# Altium PCB NewPrintMainV3.PcbDoc
Units mil, origin at the board's own origin, x right, y up, seen from the top; angles counter-clockwise.
Board outline 3935 x 3600 mil, 2 copper layers (Top Layer, Bottom Layer); 64 components, 81 nets, 214 pads, 14 vias.
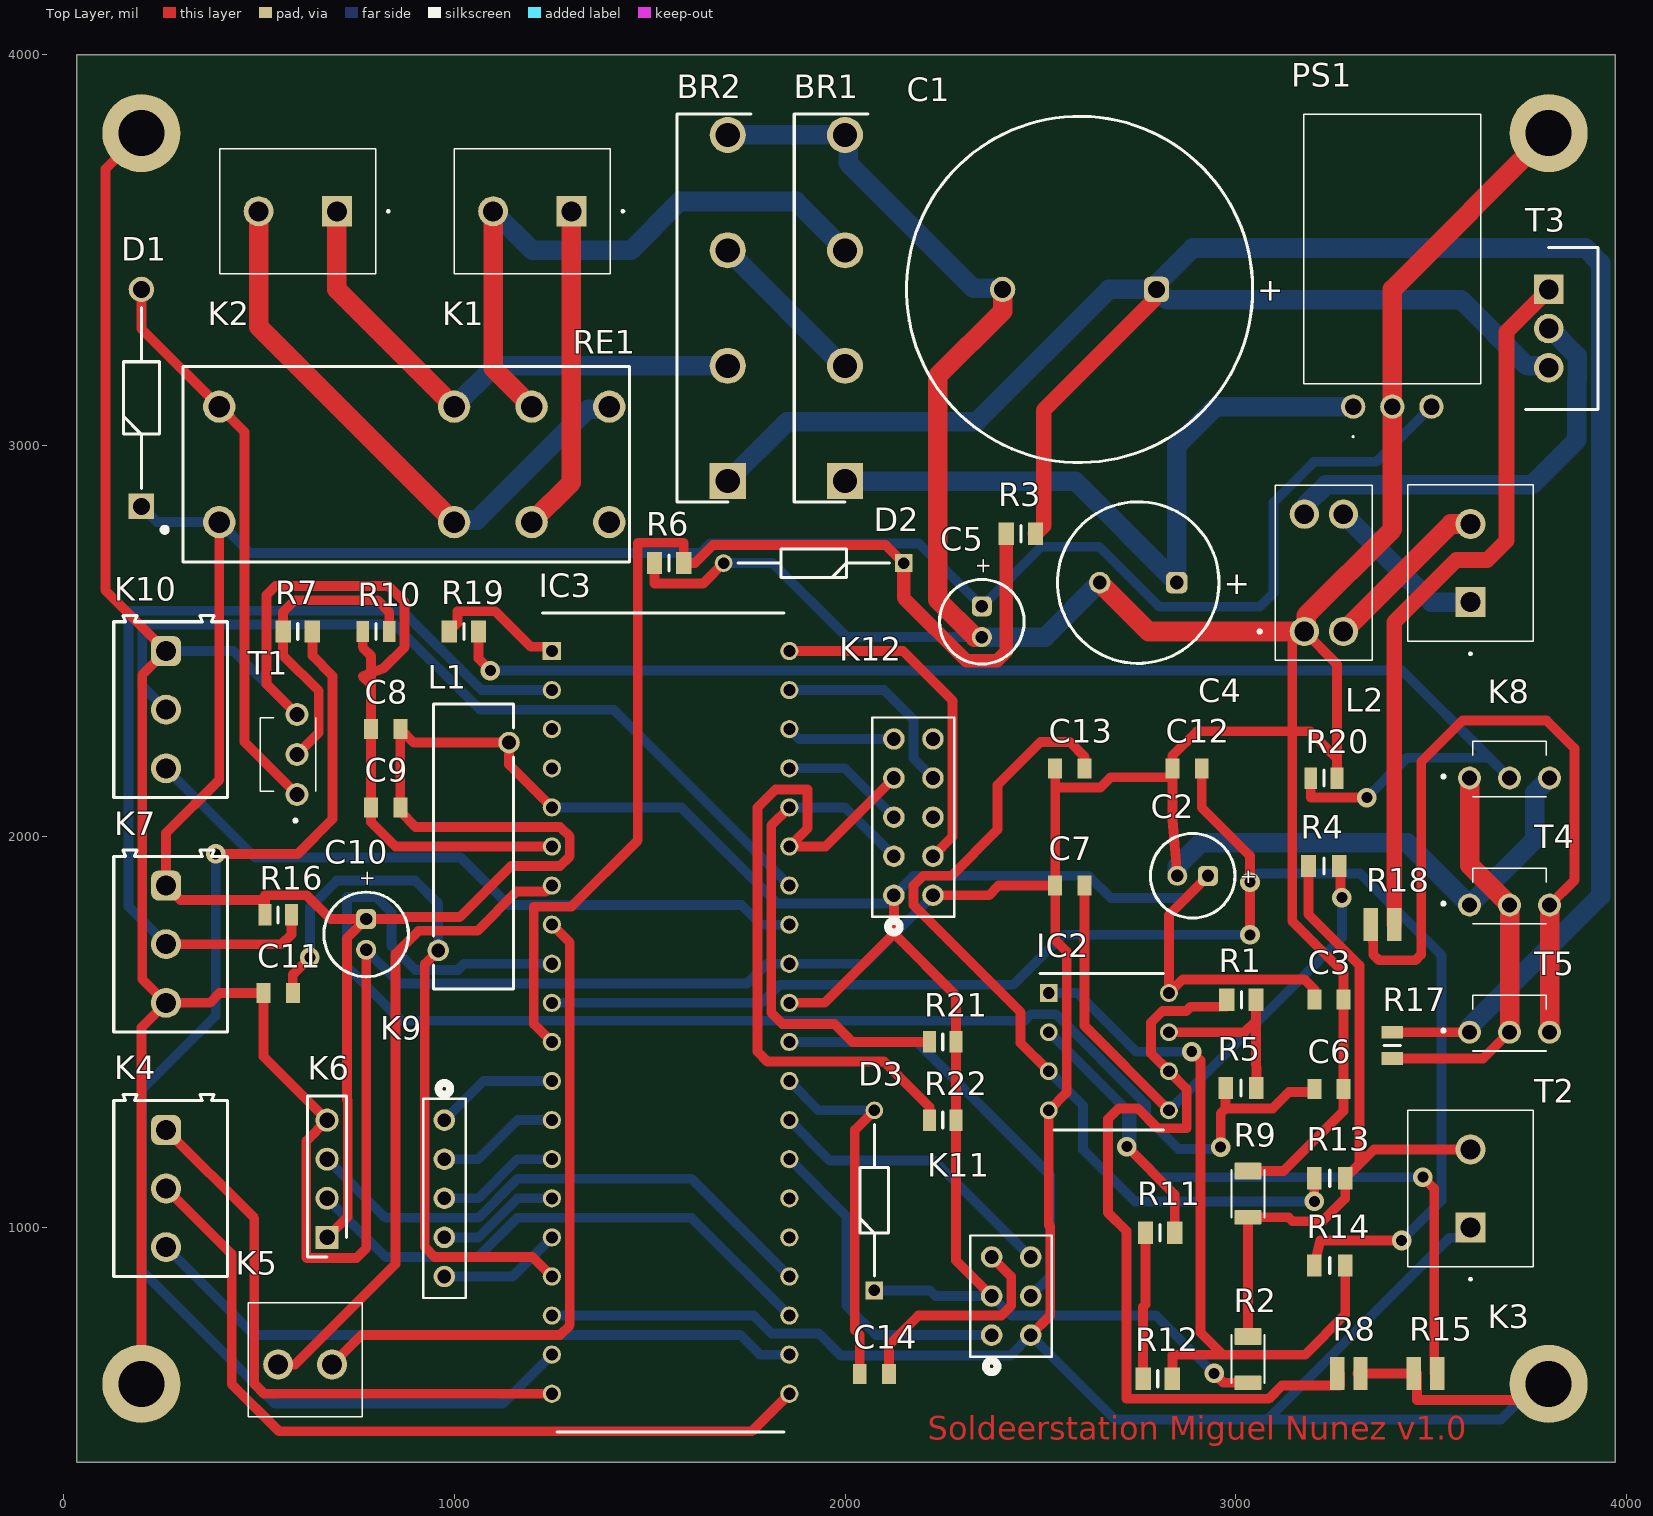
[diagram p0: Top Layer view]
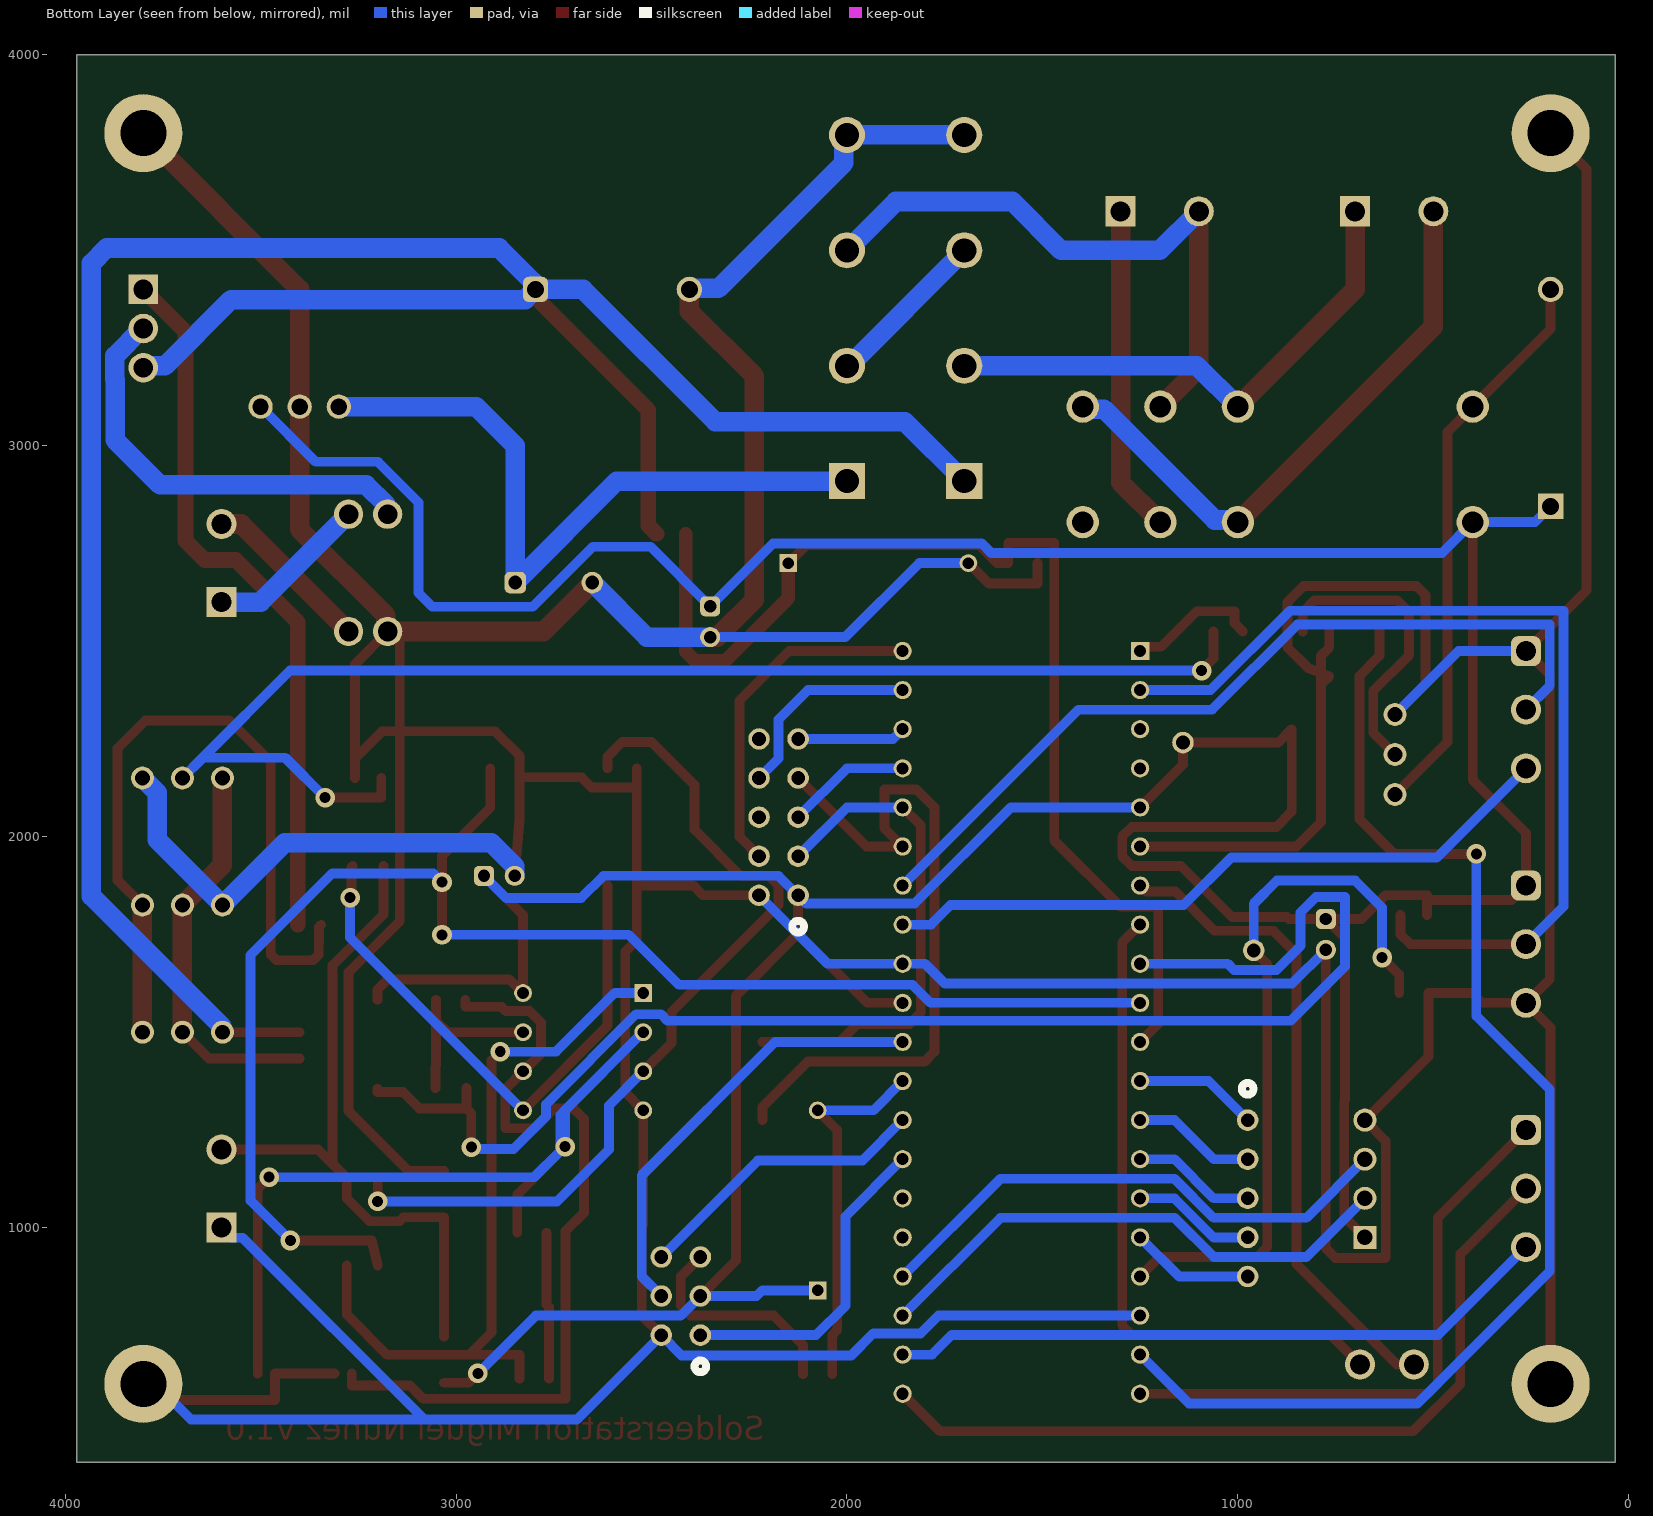
[diagram p1: Bottom Layer view, seen from below]

## Layer stack, top to bottom
Top Solder: solder mask 0.4, Solder Resist, Dk 3.5
Top Layer: signal copper 1.4
Dielectric 1: dielectric 12.6, FR-4, Dk 4.8
Bottom Layer: signal copper 1.4
Bottom Solder: solder mask 0.4, Solder Resist, Dk 3.5

## Board outline
35,400 3970,400 3970,4000 35,4000

## Design rules (kind name [scope] priority, off if disabled: settings)
Clearance [All] p1: gap=10 ignorepadtopadclearanceinfootprint=FALSE except(0: Arc-Text Arc-Hole Track-Text Track-Hole SMDPad-Text SMDPad-Hole THPad-Hole Via-Hole Fill-Hole Poly-Hole Region-Hole Text-Hole)
Height [All] p1: minheight=0 maxheight=1700 prefheight=500
HoleSize [All] p1: absolutevalues=TRUE maxlimit=120 minlimit=1 maxpercent=80.000 minpercent=20.000
PolygonConnect [All] p1: connectstyle=Relief reliefconductorwidth=10 reliefentries=4 polygonreliefangle="90 Angle" airgapwidth=10
RoutingCorners [All] p1: cornerstyle=45-Degree minsetback=150 maxsetback=150
RoutingVias [All] p1: holewidth=28 width=50 viastyle="Through Hole" minholewidth=28 minwidth=50 maxholewidth=50 maxwidth=100
SolderMaskExpansion [All] p1: expansion=4 istentingtop=FALSE
UnRoutedNet [All] p1: checkbadconnections=TRUE
Width [All] p1: maxlimit=50 minlimit=20 preferedwidth=25 minimp=50.000000 maximp=50.000000 favimp=50.000000
26 further rules are at their usual default settings.

## Classes and differential pairs
component class Voeding: BR1 BR2 C1 C4 C5 D1 D2 K1 K2 PS1 R3 R6 RE1
component class Versterker: C2 C3 C6 C7 C12 C13 IC2 K3 R1 R2 R4 R5 R8 R9 R11 R12 R13 R14 R15
component class Regelaar: K8 L2 R17 R18 R20 T2 T3 T4 T5
component class MainIC: C8 C9 C10 C11 C14 D3 IC3 K4 K5 K6 K7 K9 K10 K11 K12 L1 R7 R10 R16 R19 R21 R22 T1

## Components (designator, comment, footprint, x,y, rotation, side; value= is the part's Value field where it differs from the comment)
BR1 "KBJ608G" TO750P480X2500X1900-4P 2000,2909.45 r90 top
BR2 "KBJ608G" TO750P480X2500X1900-4P 1700,2909.45 r90 top
C1 "4700µF" WCAP-ATG8_D22H41 2600,3400 r0 top
C2 "10µF" WCAP-AT1H_D5H11 2889.37,1900 r0 top
C3 "100nF" WCAP-CSGP_0805_L2W1.25H0.8_Reflow 3238.09,1583 r0 top
C4 "100µF" WCAP-AT1H_D10H16 2750,2650 r0 top
C5 "10µF" WCAP-AT1H_D5H11 2350,2550 r90 top
C6 "10nF" WCAP-CSGP_0805_L2W1.25H0.8_Reflow 3238.09,1355 r0 top
C7 "10nF" WCAP-CSGP_0805_L2W1.25H0.8_Reflow 2575,1875 r0 top
C8 "100nF" WCAP-CSGP_0805_L2W1.25H0.8_Reflow 825,2275 r0 top
C9 "100nF" WCAP-CSGP_0805_L2W1.25H0.8_Reflow 825,2075 r0 top
C10 "10µF" WCAP-AT1H_D5H11 775,1750 r90 top
C11 "100nF" WCAP-CSGP_0805_L2W1.25H0.8_Reflow 550,1600 r0 top
C12 "10nF" WCAP-CSGP_0805_L2W1.25H0.8_Reflow 2875,2175 r0 top
C13 "10nF" WCAP-CSGP_0805_L2W1.25H0.8_Reflow 2575,2175 r0 top
C14 "100nF" WCAP-CSGP_0805_L2W1.25H0.8_Reflow 2075,625 r180 top
D1 "1N4007-B" DIOAD1410W90L470D235 200,2844.88 r90 top
D2 "1N5231B" DIOAD1165W56L425D185 2150,2700 r180 top
D3 "1N4148" DIOAD1165W56L425D185 2075,839.37 r90 top
IC2 "MCP6002-I_P" DIP781W56P254L950H533Q8N 2675,1450 r0 top
IC3 "ATMEGA4809-PF" DIP1543W58P254L5175H635Q40N 1553.74,1525 r0 top
K1 "2 pin" 1729128 1300,3600 r180 top
K2 "2 pin" 1729128 700,3600 r180 top
K3 "2 pin" 1729128 3600,1000 r90 top
K4 "3 pin" 691214310003 275,1100 r270 top
K5 "2 pin" 691214110002 550,650 r0 top
K6 "4 pin" SHDR4W78P0X254_1X4_1026X252X700P 675,975 r90 top
K7 "3 pin" 691214310003 275,1725 r270 top
K8 "2 pin" 1729128 3600,2600 r90 top
K9 "5 pin" 215297-5_TYC 975,1275 r270 top
K10 "3 pin" 691214310003 275,2325 r270 top
K11 "6pin" 215307-3_TYC 2375,725 r90 top
K12 "10 pin" 215307-5_TYC 2125,1850 r90 top
L1 "10uH, 2.5A" 744711003 1050,1975 r90 top
L2 "10A" CM2545X171B10 3175,2525 r0 top
PS1 "R-78B5.0-1.0L" R78B1210L 3300,3100 r0 top
R1 "18k" RESC2012X60N 3013.98,1583 r180 top
R2 "1M" RESC3115X65N 3030.64,663.81 r270 top value=1M0Ω
R3 "65k" RESC2012X60N 2450,2775 r0 top
R4 "5k6" RESC2012X50N 3225,1925 r180 top
R5 "5k6" RESC2012X50N 3013,1357 r0 top
R6 "10k" RESC2012X60N 1550,2700 r0 top
R7 "10k" RESC2012X60N 600,2525 r0 top
R8 "100" RESC1220X65N 3289,627 r180 top
R9 "10M" RESC3115X65N 3030.64,1087 r270 top value=1M0Ω
R10 "4k7" CAPC2012X65N 800,2525 r180 top
R11 "18k" RESC2012X60N 2806,987 r0 top
R12 "18k" RESC2012X60N 2800,613.22 r180 top
R13 "5k6" RESC2012X50N 3240,1126 r0 top
R14 "5k6" RESC2012X50N 3240,903 r0 top
R15 "100" RESC1220X65N 3485,627 r0 top
R16 "4k7" CAPC2012X65N 550,1800 r180 top
R17 "4k7" CAPC2012X65N 3400,1466.14 r90 top
R18 "100" RESC1220X65N 3375,1775 r0 top
R19 "10k" RESC2012X60N 1025,2525 r0 top
R20 "4k7" CAPC2012X65N 3225,2150 r180 top
R21 "4k7" CAPC2012X65N 2250,1475 r0 top
R22 "4k7" CAPC2012X65N 2250,1275 r180 top
RE1 "RT424005" RT42 399.21,2952.36 r0 top
T1 "NPN BC547CTFR" BC33740TA 575,2175 r90 top
T2 "NPN BC547CTFR" BC33740TA 3664.57,1523.03 r0 top
T3 "IRF9Z34NPBF" TO254P469X1042X1967-3P 3800,3400 r270 top
T4 "NPN BC547CTFR" BC33740TA 3664.57,2173.03 r0 top
T5 "BC557ATA" BC33740TA 3664.57,1848.03 r0 top

## Footprints (in the part's own frame and the unit in brackets; to place one, negate y for a bottom-side part, rotate by r counter-clockwise, add the part's x,y. Pads: shape width x height; smd on the part's side, far side on the other; paste and mask are expansions set on the pad)
215297-5_TYC [mil]
  round 55 hole 35 mask+0: 1(0,0) 2(100,0) 3(200,0) 4(300,0) 5(400,0)
  silkscreen extent -95,-54 455,55, body extent 0,0 10,10, height 10
215307-3_TYC [mil]
  round 55 hole 35 mask+0: 1(0,0) 2(100,0) 3(200,0) 4(200,-100) 5(100,-100) 6(0,-100)
  silkscreen extent -95,-154 255,55, body extent 0,0 10,10, height 10
215307-5_TYC [mil]
  round 55 hole 35 mask+0: 1(0,0) 2(100,0) 3(200,0) 4(300,0) 5(400,0) 6(400,-100) 7(300,-100) 8(200,-100) 9(100,-100) 10(0,-100)
  silkscreen extent -95,-154 455,55, body extent 0,0 10,10, height 10
1729128 [mm]
  rect 1.95x1.95 hole 1.3: 1(0,0)
  round 1.95 hole 1.3: 2(5.08,0)
  silkscreen extent -3.4,-4.08 7.62,4.08, body extent -3.07,-9.9 7.49,3.6, height 4.05
744711003 [mm] "Rod Core Choke, THT, 2-leads"
  round 1.4 hole 0.9: 1(-6.75,2.3) 2(6.75,-2.3)
  silkscreen extent -9.25,-2.6 9.25,2.6, body extent -9,-2.55 9,2.55, height 5.2
691214110002 [mm]
  round 1.95 hole 1.3: 1(0,0) 2(3.5,0)
  silkscreen extent -1.95,-3.4 5.45,4, body extent -1.95,-3.4 5.45,4, height 8.8
691214310003 [mm] "3,81mm - Horizontal wire entry - Rising cage clamp - 03p"
  rrect50% 1.95x1.95 hole 1.3: 1(-3.81,-0.3)
  round 1.95 hole 1.3: 2(0,-0.3) 3(3.81,-0.3)
  silkscreen extent -6.11,-3.7 5.71,3.7, body extent -6.12,-3.7 5.71,3.7, height 8.55
BC33740TA [mm]
  round 1.493 hole 0.96: 1(-1.7,-0.585) 2(0.9,-0.585) 3(3.5,-0.585)
  silkscreen extent -3.5,-1.81 3.28,1.81, body extent -2.2,-2.42 3.96,1.71, height 8.67
CAPC2012X65N [mm]
  rect 0.83x1.39 smd: 1(-0.86,0) 2(0.86,0)
  silkscreen extent 0,-0.53 0,0.53, body extent -1,-0.63 1,0.63, height 0.65
CM2545X171B10 [mil]
  round 75 hole 50: 1(0,0) 2(100,0) 3(100,300) 4(0,300)
  silkscreen extent -118,-74 174,374, body extent -74,-74 174,374, height 378
DIOAD1165W56L425D185 [mm]
  rect 1.15x1.15 hole 0.75: 1(0,0)
  round 1.15 hole 0.75: 2(11.7,0)
  silkscreen extent 0.93,-0.93 10.77,0.93, body extent -0.28,-0.92 11.93,0.92, height 1.84
DIOAD1410W90L470D235 [mm]
  rect 1.65x1.65 hole 1.1: 1(0,0)
  round 1.65 hole 1.1: 2(14.1,0)
  silkscreen extent 1.18,-1.18 12.92,1.18, body extent -0.45,-1.35 14.55,1.35, height 2.69
DIP781W56P254L950H533Q8N [mm]
  rect 1.159x1.159 hole 0.759: 1(-3.905,3.81)
  round 1.159 hole 0.759: 2(-3.905,1.27) 3(-3.905,-1.27) 4(-3.905,-3.81) 5(3.905,-3.81) 6(3.905,-1.27) 7(3.905,1.27) 8(3.905,3.81)
  silkscreen extent -4.48,-5.08 3.56,5.08, body extent -4.05,-4.75 4.05,4.75, height 5.33
DIP1543W58P254L5175H635Q40N [mm]
  rect 1.184x1.184 hole 0.784: 1(-7.715,24.13)
  round 1.184 hole 0.784: 2(-7.715,21.59) 3(-7.715,19.05) 4(-7.715,16.51) 5(-7.715,13.97) 6(-7.715,11.43) 7(-7.715,8.89) 8(-7.715,6.35) 9(-7.715,3.81) 10(-7.715,1.27) 11(-7.715,-1.27) 12(-7.715,-3.81) 13(-7.715,-6.35) 14(-7.715,-8.89) 15(-7.715,-11.43) 16(-7.715,-13.97) 17(-7.715,-16.51) 18(-7.715,-19.05) 19(-7.715,-21.59) 20(-7.715,-24.13) 21(7.715,-24.13) 22(7.715,-21.59) 23(7.715,-19.05) 24(7.715,-16.51) 25(7.715,-13.97) 26(7.715,-11.43) 27(7.715,-8.89) 28(7.715,-6.35) 29(7.715,-3.81) 30(7.715,-1.27) 31(7.715,1.27) 32(7.715,3.81) 33(7.715,6.35) 34(7.715,8.89) 35(7.715,11.43) 36(7.715,13.97) 37(7.715,16.51) 38(7.715,19.05) 39(7.715,21.59) 40(7.715,24.13)
  silkscreen extent -8.31,-26.61 7.37,26.61, body extent -7.86,-25.88 7.86,25.88, height 6.35
R78B1210L [mm]
  round 1.575 hole 1.05: 1(0,0) 2(2.54,0) 3(5.08,0)
  silkscreen extent -3.21,-2 8.29,19, body extent -3.26,-0.17 8.34,18.83, height 8.51
RESC1220X65N [mm]
  rect 0.925x2.15 smd: 1(-0.762,0) 2(0.762,0)
  body extent -0.6,-1 0.6,1, height 0.65
RESC2012X50N [mm]
  rect 0.95x1.45 smd: 1(-1,0) 2(1,0)
  silkscreen extent 0,-0.53 0,0.53, body extent -1.02,-0.63 1.02,0.63, height 0.5
RESC2012X60N [mm]
  rect 1x1.45 smd: 1(-0.95,0) 2(0.95,0)
  silkscreen extent 0,-0.53 0,0.53, body extent -1,-0.63 1,0.63, height 0.5
RESC3115X65N [mm]
  rrect14% 1.09x1.77 smd: 1(-1.465,0)
  rrect14% 0.94x1.77 smd: 2(1.54,0)
  silkscreen extent -1.55,-1.07 1.55,1.07
RT42 [mm]
  round 2.1 hole 1.4: 1(0,-3.75) 2(15.26,-3.75) 3(20.3,-3.75) 4(25.34,-3.75) 5(25.34,3.75) 6(20.3,3.75) 7(15.26,3.75) 8(0,3.75)
  silkscreen extent -3.67,-6.35 26.65,6.35, body extent -2.21,-6.35 26.79,6.35, height 15.86
SHDR4W78P0X254_1X4_1026X252X700P [mm]
  rect 1.5x1.5 hole 1: 1(0,0)
  round 1.5 hole 1: 2(2.54,0) 3(5.08,0) 4(7.62,0)
  silkscreen extent -1.27,-1.26 9.19,1.26, body extent -1.21,-1.26 8.95,1.26, height 6.9
TO254P469X1042X1967-3P [mm]
  rect 1.92x1.92 hole 1.28: 1(0,0)
  round 1.92 hole 1.28: 2(2.54,0) 3(5.08,0)
  silkscreen extent -2.73,-1.49 7.81,3.2, body extent -2.67,-1.5 7.75,3.19, height 18.84
TO750P480X2500X1900-4P [mm]
  rect 2.34x2.34 hole 1.56: 1(0,0)
  round 2.34 hole 1.56: 2(7.5,0) 3(15,0) 4(22.5,0)
  silkscreen extent -1.35,-1.5 23.85,3.3, body extent -1.25,-1.5 23.75,3.3, height 18.5
WCAP-AT1H_D5H11 [mm] "Aluminium Electrolytic Radial THD Capacitors, 5x11mm"
  rrect50% 1.3x1.3 hole 0.8: 1(1,0)
  round 1.3 hole 0.8: 2(-1,0)
  silkscreen extent -2.75,-2.75 2.75,2.75, body extent -2.49,-2.5 2.5,2.5, height 11.26
WCAP-AT1H_D10H16 [mm] "Aluminium Electrolytic Radial THD Capacitors, 10x16mm"
  rrect50% 1.4x1.4 hole 0.9: 1(2.5,0)
  round 1.4 hole 0.9: 2(-2.5,0)
  silkscreen extent -5.25,-5.25 5.25,5.25, body extent -4.99,-5 5,5, height 16.26
WCAP-ATG8_D22H41 [mm] "Aluminum Electrolytic Capacitors, 22x41mm"
  rrect50% 1.65x1.65 hole 1.1: 1(5,0)
  round 1.65 hole 1.1: 2(-5,0)
  silkscreen extent -11.25,-11.25 11.25,11.25, body extent -10.99,-11 11,11, height 41.31
WCAP-CSGP_0805_L2W1.25H0.8_Reflow [mm] "Ceramic Capacitors, body 2x1.25mm"
  rect 0.9x1.3 smd: 1(-0.95,0) 2(0.95,0)
  body extent -1,-0.62 1,0.63, height 0.8

## Part data
BR1 BR2: "Bridge Rectifier", Manufacturer_Name="Diodes Inc.", Mouser2 Part Number=621-KBJ608G, Datasheet Link=https://componentsearchengine.com//KBJ608G.pdf, Height=4.8mm, Manufacturer_Part_Number=KBJ608G, Mouser2 Price/Stock=https://www.mouser.com/Search/Refine.aspx?Keyword=621-KBJ608G
C1: library part "ELCAP 4700µF", "Capacitor Polarised ESK478M050AQ3AA", Manufacturer_Name=Kemet, Manufacturer_Part_Number=ESK478M050AQ3AA, Mouser2 Part Number=80-ESK478M050AQ3AA, Datasheet Link=https://componentsearchengine.com//ESK478M050AQ3AA.pdf, Height=37mm, Mouser2 Price/Stock=https://www.mouser.com/Search/Refine.aspx?Keyword=80-ESK478M050AQ3AA
C2 C5 C10: library part "ELCAP 10µF", "Capacitor Polarised Wurth Elektronik 860240672002 10µF", Manufacturer_Name="Wurth Elektronik", Manufacturer_Part_Number=860240672002, Datasheet Link=https://katalog.we-online.de/pbs/datasheet/860240672002.pdf, Height=12.5mm
C3 C8 C9 C11 C14: library part "CAP 0.1µF (100nF)", "Capacitor C0805C104K8RACAUTO", Manufacturer_Name=Kemet, Manufacturer_Part_Number=C0805C104K8RACAUTO, Datasheet Link=https://ad.componentsearchengine.com/Datasheets/2/C0805C104K8RACAUTO.pdf, Height=0.88mm
C4: library part "ELCAP 100µF", "Capacitor Polarised 100µF Wurth 860241181006", Manufacturer_Name="Wurth Elektronik", Manufacturer_Part_Number=860241181006, Datasheet Link=https://www.we-online.de/katalog/datasheet/860241181006.pdf, Height=27mm
C6 C7 C12 C13: library part "CAP 0.01µF WE", "WCAP-CSGP Multilayer Ceramic Chip Capacitor, General Purpose, size 0805, X7R, 10nF, 50V  885012207092", Capacitance Tolerance=+/-10%, Isolation Resistance=10GOhm, Manufacturer="Wurth Elektronik", Manufacturer Part Number=885012207092, Operating Temperature max.=125C, Operating Temperature min.=-55C, Rated Voltage=50V, Capacitance=10nF, Ceramic Type=X7R, ComponentLink1Description="Manufacturer Link", ComponentLink1URL=http://www.we-online.de, ComponentLink2Description=Datasheet, ComponentLink2URL=https://www.we-online.com/catalog/datasheet/885012207092.pdf, Dissipation Factor=2.5%, Height=0.8mm, Length=2mm, Mounting Technology=SMT, Packaging="Tape and Reel", Size=0805, Technical Reference=X7R0805103K050DFCT10000, Width=1.25mm
D1: library part "D 1N4007-B", "Diode 1N4007-B 1000V, 1A", Manufacturer_Name=Rectron, Datasheet Link=https://www.arrow.com/en/products/1n4007-b/rectron, Manufacturer_Part_Number=1N4007-B
D2: library part "ZD 1N5231B", "Zenerdiode 1N5231B 5.1V 500mW", Mfr_Name=onsemi, Copyright="Copyright (C) 2022 Ultra Librarian. All rights reserved.", Manufacturer_Part_Number=1N5231B, RefDes=RefDes, Type=DEV
D3: library part "D 1N4148", "Diode 1N4148 100V, 200mA", Manufacturer_Name=Nexperia, Datasheet Link=https://datasheet.datasheetarchive.com/originals/distributors/Datasheets-112/DSAP0040891.pdf, Manufacturer_Part_Number=1N4148
IC2: "Integrated Circuit Dual OPAMP MCP6002-I/P", Manufacturer_Name=Microchip, Manufacturer_Part_Number=MCP6002-I/P, Mouser2 Part Number=579-MCP6002-I/P, Datasheet Link=https://componentsearchengine.com//MCP6002-I_P.pdf, Height=5.334mm, Mouser2 Price/Stock=https://www.mouser.com/Search/Refine.aspx?Keyword=579-MCP6002-I%2FP
IC3: "Integrated Circuit", Manufacturer_Name=Microchip, Mouser2 Part Number=556-ATMEGA4809-PF, Datasheet Link=https://componentsearchengine.com//ATMEGA4809-PF.pdf, Height=6.35mm, Manufacturer_Part_Number=ATMEGA4809-PF, Mouser2 Price/Stock=https://www.mouser.com/Search/Refine.aspx?Keyword=556-ATMEGA4809-PF
K1 K2 K3 K8: library part "Term. blok 2 pin", "Connector Term. blok. 1729128 2 pin", Manufacturer_Name="Phoenix Contact", Manufacturer_Part_Number=1729128, Datasheet Link=http://www.phoenixcontact.com/de/produkte/1729128/pdf, Height=10.15mm
K4 K7 K10: library part "Header 1x3pin", "Connector 61900311121 3 pin", Manufacturer_Name="Wurth Elektronik", Manufacturer_Part_Number=61900311121, Datasheet Link=https://katalog.we-online.de/em/datasheet/61900311121.pdf, Height=11.75mm
K5: library part "Header 1x2pin", "Connector 2 pin 212520-1002", Manufacturer_Name=Molex, Manufacturer_Part_Number=212520-1002, Datasheet Link=https://www.molex.com/pdm_docs/sd/2125201002_sd.pdf, Height=13.6mm
K6: library part "Header 1x4pin", "Connector 216571-3004 1x4 pin", Manufacturer_Name=Molex, Manufacturer_Part_Number=216571-3004, Datasheet Link=https://www.molex.com/pdm_docs/sd/2165711002_sd.pdf, Height=9.91mm
K9: library part "Header 1x 5pin", "Header, 5-Pin", LatestRevisionDate=17-Jul-2002, LatestRevisionNote="Re-released for DXP Platform.", Publisher="Altium Limited"
K11: library part "Header 2x3", "Header, 3-Pin, Dual row", LatestRevisionDate=17-Jul-2002, LatestRevisionNote="Re-released for DXP Platform.", Publisher="Altium Limited"
K12: library part "Header 2x5", "Header, 5-Pin, Dual row", LatestRevisionDate=17-Jul-2002, LatestRevisionNote="Re-released for DXP Platform.", Publisher="Altium Limited"
L1: library part "spoel WE klein", "WE-SD THT Rod Core Choke, 10uH, 2.5A  744711003", DC Resistance=33mOhm, Inductance=10uH, Manufacturer="Wurth Elektronik", Manufacturer Part Number=744711003, Operating Temperature="-40 to +150degC", Rated Current=2.5A, ComponentLink1Description=Manufacturer, ComponentLink1URL=http://www.we-online.de, ComponentLink2Description=Datasheet, ComponentLink2URL=https://www.we-online.com/catalog/datasheet/744711003.pdf, Mounting Technology=THT, Packaging=Carton, Published Date="May 2021"
L2: library part CM2545X171B-10, "common mode smoorspoel 10A", Manufacturer_Name="Laird Technologies", Datasheet Link=https://datasheet.datasheetarchive.com/originals/dk/DKDS-7/122753.pdf, Height=9.5mm, Manufacturer_Part_Number=CM2545X171B-10
PS1: "Power Supply DC/DC converter 6.5-34Vin 5Vout", Manufacturer_Name="RECOM Power", Mouser2 Part Number=919-R-78B5.0-1.0L, Datasheet Link=https://componentsearchengine.com//R-78B5.0-1.0L.pdf, Height=9mm, Manufacturer_Part_Number=R-78B5.0-1.0L, Mouser2 Price/Stock=https://www.mouser.com/Search/Refine.aspx?Keyword=919-R-78B5.0-1.0L
R1 R11 R12: library part "RES 18k 0805", "18kΩ ±0.5% 0.1W 1/10W Chip Resistor 0805 (2012 Metric) Thin Film  RR1220P-183-D", Case Code (Imperial)=0805, Case Code (Metric)=2012, Max Operating Temperature=125°C, Max Power Dissipation=100mW, Min Operating Temperature=-55°C, Resistance=18kR, Temperature Coefficient=25ppm/°C, Tolerance=0.5%, Voltage Rating=100V, Case/Package=0805, Depth=1.25mm, Height=0.4mm, Lead Free="Lead Free", Length=2mm, Mount="Surface Mount", Number of Terminations=2, Packaging="Tape and Reel", Power Rating=100mW, RoHS Compliant=Yes, Series=RR, Size Code=0805, Technology="THIN FILM", Termination=SMD/SMT, Voltage Rating (DC)=100V
R2: library part "RES 1M 1206", "Res Thin Film 1206 1M0Ω 0.1% 0.25W 15ppm/°C Molded SMD", Manufacturer="TE Connectivity", Manufacturer Part Number=RP73D2B1M0BTDF, Package=RP732B, Power Rating=0.25W, Resistance=1M0Ω, Temperature="-55°C to 155°C", Temperature Coefficient=15ppm/°C, Temperature Range High=155°C, Temperature Range Low=-55°C, Tolerance=0.1%, Voltage Rating=200V, Automotive=No, Category=Res, ComponentLink2Description=Datasheet, ComponentLink2URL=https://www.te.com/commerce/DocumentDelivery/DDEController?Action=showdoc&DocId=Data+Sheet%7F1773272%7FL%7Fpdf%7FEnglish%7FENG_DS_1773272_L.pdf%7F8-1879255-6, Composition="Thin Film", Device Class L1="Passive Components", Device Class L2=Resistors, Device Class L3="Chip SMD Resistors", Height=0.65mm, Ipc Land Pattern Name=RESC305155X55, Lead Free=Yes, Octopart=https://octopart.com/rp73d2b1m0btdf-te+connectivity-22741454, octopart_url=https://octopart.com/rp73d2b1m0btdf-te+connectivity-22741454, Packaging="1000 Reel", RoHS=TRUE, Series=RP73
R3: library part "RES 68k 0805", "Res Thin Film 0805 68K Ohm 0.1% 1/8W ±25ppm/°C Molded SMD SMD Punched Carrier T/R", Case Code (Imperial)=0805, Case Code (Metric)=2012, Manufacturer=Panasonic, Manufacturer Part Number=ERA-6AEB683V, Max Operating Temperature=155°C, Max Power Dissipation=125mW, Min Operating Temperature=-55°C, Package Quantity=5000, Resistance=68kR, Resistance Tolerance=0.1%, Resistor Type="Thin Film", Temperature Coefficient=25ppm/°C, Voltage Rating=100V, Case/Package=0805, Category="Chip SMD Resistors", ComponentLink1Description=https://datasheet.ciiva.com/11812/0900766b80beefcc-11812834.pdf?src-supplier=RSComponents, ComponentLink1URL=https://datasheet.ciiva.com/11812/0900766b80beefcc-11812834.pdf?src-supplier=RSComponents, ComponentLink2Description=https://datasheet.ciiva.com/26335/453596-da-01-en-widerstand-0805-era-26335721.pdf?src-supplier=Conrad, ComponentLink2URL=https://datasheet.ciiva.com/26335/453596-da-01-en-widerstand-0805-era-26335721.pdf?src-supplier=Conrad, ComponentLink3Description=https://datasheet.ciiva.com/7886/485442-7886653.pdf?src-supplier=Element14, ComponentLink3URL=https://datasheet.ciiva.com/7886/485442-7886653.pdf?src-supplier=Element14, ComponentLink4Description=https://datasheet.ciiva.com/48530/era-eng-tds-48530013.pdf?src-supplier=Distrelec, ComponentLink4URL=https://datasheet.ciiva.com/48530/era-eng-tds-48530013.pdf?src-supplier=Distrelec, ComponentLink5Description=https://datasheet.ciiva.com/48425/era-eng-tds-48425626.pdf?src-supplier=Distrelec, ComponentLink5URL=https://datasheet.ciiva.com/48425/era-eng-tds-48425626.pdf?src-supplier=Distrelec, ComponentLink6Description=https://datasheet.ciiva.com/6138/485442-6138605.pdf?src-supplier=Farnell, ComponentLink6URL=https://datasheet.ciiva.com/6138/485442-6138605.pdf?src-supplier=Farnell, ComponentLink7Description=https://datasheet.ciiva.com/7886/485442-7886654.pdf?src-supplier=Element14, ComponentLink7URL=https://datasheet.ciiva.com/7886/485442-7886654.pdf?src-supplier=Element14, ComponentLink8Description=https://datasheet.ciiva.com/9188/aoa0000ce26-9188075.pdf?src-supplier=Avnet, ComponentLink8URL=https://datasheet.ciiva.com/9188/aoa0000ce26-9188075.pdf?src-supplier=Avnet, ComponentLink9Description=https://datasheet.ciiva.com/30076/54aoa0000ce26-30076872.pdf?src-supplier=Onlinecomponents.com, ComponentLink9URL=https://datasheet.ciiva.com/30076/54aoa0000ce26-30076872.pdf?src-supplier=Onlinecomponents.com, ComponentLink10Description=https://datasheet.ciiva.com/17208/aoa0000ce26-17208888.pdf?src-supplier=Avnet+Europe, ComponentLink10URL=https://datasheet.ciiva.com/17208/aoa0000ce26-17208888.pdf?src-supplier=Avnet+Europe, Construction=Rectangular, Contact Plating=Tin, Depth=1.25mm, Height=0.5mm, Lead Free="Lead Free", Length=2mm, Military Standard=Not, Mount="Surface Mount", Number of Pins=2, Number of Terminations=2, Packaging="Tape and Reel", Power Rating=125mW, Pricing 1="5=0,49000, 50=0,45500, 100=0,42500, 250=0,39500, 500=0,36300 (USD)", Radiation Hardening=No, REACH SVHC="No SVHC", RoHS=Yes, Series=ERA-6A, Stock 1=790, Supplier 1=RSComponents, Technology="METAL FILM", Termination=SMD/SMT, Tolerance=0.1%, Voltage Rating (DC)=100V, Width=1.25mm
R4 R5 R13 R14: library part "RES 5k6 0805", "5k6 SMD 0805  CRCW08055K60JNEA", Manufacturer_Name=Vishay, Manufacturer_Part_Number=CRCW08055K60JNEA, Datasheet Link=http://www.vishay.com/docs/20035/dcrcwe3.pdf, Height=0.5mm
R6 R7 R19: library part "RES 10k 0805", "10k SMD 0805  CR0805-FX-1002ELF", Manufacturer_Name=Bourns, Manufacturer_Part_Number=CR0805-FX-1002ELF, Mouser2 Part Number=652-CR0805FX-1002ELF, Datasheet Link=https://componentsearchengine.com//CR0805-FX-1002ELF.pdf, Height=0.6mm, Mouser2 Price/Stock=https://www.mouser.com/Search/Refine.aspx?Keyword=652-CR0805FX-1002ELF
R8 R15 R18: library part "RES 100 0508", "100 Ohm SMD 0508  LTR10EZPJ101", Manufacturer_Name="ROHM Semiconductor", Manufacturer_Part_Number=LTR10EZPJ101, Mouser2 Part Number=755-LTR10EZPJ101, Datasheet Link=https://componentsearchengine.com//LTR10EZPJ101.pdf, Height=0.65mm, Mouser2 Price/Stock=https://www.mouser.com/Search/Refine.aspx?Keyword=755-LTR10EZPJ101
R9: library part "RES 10M 1206", "Res Thin Film 1206 1M0Ω 0.1% 0.25W 15ppm/°C Molded SMD  1206 10M 5% 0.25W TCR200", Manufacturer="TE Connectivity", Manufacturer Part Number=RP73D2B1M0BTDF, Package=RP732B, Power Rating=0.25W, Resistance=1M0Ω, Temperature="-55°C to 155°C", Temperature Coefficient=15ppm/°C, Temperature Range High=155°C, Temperature Range Low=-55°C, Tolerance=0.1%, Voltage Rating=200V, Automotive=No, Category=Res, ComponentLink2Description=Datasheet, ComponentLink2URL=https://www.te.com/commerce/DocumentDelivery/DDEController?Action=showdoc&DocId=Data+Sheet%7F1773272%7FL%7Fpdf%7FEnglish%7FENG_DS_1773272_L.pdf%7F8-1879255-6, Composition="Thin Film", Device Class L1="Passive Components", Device Class L2=Resistors, Device Class L3="Chip SMD Resistors", Height=0.65mm, Ipc Land Pattern Name=RESC305155X55, Lead Free=Yes, Octopart=https://octopart.com/rp73d2b1m0btdf-te+connectivity-22741454, octopart_url=https://octopart.com/rp73d2b1m0btdf-te+connectivity-22741454, Packaging="1000 Reel", RoHS=TRUE, Series=RP73
R10 R16 R17 R20 R21 R22: library part "RES 4k7 0805", "4k7 SMD 0805  ESR10EZPJ472", Manufacturer_Name="ROHM Semiconductor", Manufacturer_Part_Number=ESR10EZPJ472, Datasheet Link=https://componentsearchengine.com/Datasheets/2/ESR10EZPJ472.pdf, Height=0.65mm
RE1: "Relay or Contactor", Manufacturer_Name="TE Connectivity", Mouser2 Part Number=655-RT424005, Datasheet Link=https://componentsearchengine.com//RT424005.pdf, Manufacturer_Part_Number=RT424005, Mouser2 Price/Stock=https://www.mouser.com/Search/Refine.aspx?Keyword=655-RT424005
T1 T2 T4: library part "TR BC547CTFR", "Transistor BC547CTFR NPN", Manufacturer_Part_Number=BC547CTFR, Mfr_Name=onsemi, Copyright="Copyright (C) 2022 Ultra Librarian. All rights reserved.", RefDes=RefDes, Type=DEV
T3: library part "TR IRF9Z34NPBF", "MOSFET (P-Channel)", Manufacturer_Name=Infineon, Mouser2 Part Number=942-IRF9Z34NPBF, Datasheet Link=https://componentsearchengine.com//IRF9Z34NPBF.pdf, Height=4.69mm, Manufacturer_Part_Number=IRF9Z34NPBF, Mouser2 Price/Stock=https://www.mouser.com/Search/Refine.aspx?Keyword=942-IRF9Z34NPBF
T5: library part "TR BC557ATA", "Transistor BJT BC557ATA PNP", Manufacturer_Name="ON Semiconductor", Mouser2 Part Number=512-BC557ATA, Datasheet Link=https://componentsearchengine.com//BC557ATA.pdf, Manufacturer_Part_Number=BC557ATA, Mouser2 Price/Stock=https://www.mouser.com/Search/Refine.aspx?Keyword=512-BC557ATA

## Free pads (board coordinates)
  round 200 hole 118.11: 16(200,3800) 17(3800,3800) 18(200,600) 19(3800,600)

## Via types
v1: diameter 50, hole 28, Top Layer to Bottom Layer, 14 vias

## Nets (pads, with @x,y where several pads share a name; then routed paths per layer and width w, separated by ;. In a path a pad name is that pad's centre, name@x,y a point inside that pad or via, vN(x,y) a via of type N, cw(c..) or ccw(c..) an arc to the next point about the centre after c; other vN are vias at no path point)
+5: C2.1 C3.1 C5.1 C8.2 C9.2 C10.1 D1.1 D3.1 IC2.8 IC3.5 IC3.31 K6.1 K7.1 K11.2 K12.1 L1.2 PS1.3 R2.2 R16.2 R21.2 R22.1 RE1.1 | length 13302.8
  Top Layer w25: RE1.1 399.21,2145.21 263.19,2009.19 K7.1 300.19,1838 516.14,1838 ; R16.2 516.14,1838 ; K6.1 728,1028 728,1325 726,1327 726,1740.37 C10.1 ; IC3.5 1140.55,2184.45 L1.2 896.65,2240.75 C8.2 C9.2 862.4,2064 901.4,2025 1271,2025 1296,2000 1296,1950 1271,1925 1145.28,1925 1014.59,1794.31 874.39,1794.31 869.45,1789.37 C10.1 ; IC3.31 1947.96,1575 2125,1752.04 ; K12.1 2125,1752.04 ; K11.2 2283.86,916.14 R22.1 R21.2 2283.86,1593.18 2125,1752.04 ; C2.1 2828.74,1800 IC2.8 2863.74,1635 3175,1635 3200.69,1609.31 C3.1 ; v1(2944,627) 2967.82,603.18 R2.2 ; 516.14,1838 516.14,1850 623,1850 683.63,1789.37 C10.1
  Bottom Layer w25: D1.1 240.16,2804.72 RE1.1 477.94,2726 1631,2726 1655,2750 2189.37,2750 C5.1 2502.63,2742 2650,2742 2804,2588 3060,2588 3096,2624 3096,2855 3200,2959 3359,2959 PS1.3 ; IC3.5 1581,2075 1826.81,1829.19 2104.19,1829.19 K12.1 2175,1900 2623,1900 2680,1843 2871.74,1843 C2.1 ; D3.1 2217,839.37 2231.37,825 K11.2 2425,775 2796,775 v1(2944,627)
GND: BR1.4 BR2.4 C1.2 C2.2 C3.2 C4.2 C5.2 C6.2 C7.1 C8.1 C9.1 C10.2 C11.1 C12.1 C13.1 D2.2 IC2.4 IC3.6 IC3.18 IC3.32 K3.1 K6.4 K7.3 K10.1 K11.6 K12.10 L2.1 pad.16 pad.17 pad.18 pad.19 PS1.2 R6.1 R8.1 R9.1 R10.2 R15.1 R20.1 T1.3 T4.3 T5.1 | length 24935.6
  Top Layer w25: pad.18 200,1511.81 K7.3 ; pad.16 108,3708 108,2630.19 K10.1 202,2413.81 202,1636.19 K7.3 ; T1.3 520,2390.83 520,2618 543,2641 832,2641 873,2600 873,2484.4 819.57,2430.97 787.6,2418.7 ; R10.2 766.14,2484.4 787.6,2462.95 787.6,2418.7 ; C10.2 775,947 750,922 623,922 622,923 622,1222 K6.4 512.6,1437.4 C11.1 400,1600 375,1575 K7.3 ; IC3.6 850,1975 787.6,2037.4 C9.1 C8.1 787.6,2389 ; R6.1 1512.6,2648 1637.37,2648 D2.2 ; K12.10 2368,1850 2393,1875 C7.1 ; K11.6 2525,775 2525,1003.26 2521.26,1007 IC2.4 2567,1345.74 2567,1706.6 2537.6,1736 C7.1 ; C13.1 2537.6,2126 ; C2.2 2837.6,2043.4 C12.1@2837.6,2152 ; R9.1 3121.68,1144.68 3275.5,1298.5 C6.2 C3.2 3275.5,1653 3144,1784.5 3144,2269.6 ; R20.1 3258.86,2200 ; R8.1@3311.13,627 R8.1 R15.1 3462.87,627 3462.87,559 3800,559 pad.19 ; 787.6,2389 787.6,2418.7 ; 787.6,2389 766.14,2410.46 787.6,2418.7 ; C7.1 2537.6,2126 ; 2537.6,2126 2653,2126 2679,2152 C12.1@2837.6,2152 ; C12.1@2837.6,2152 C12.1 2837.6,2207.2 2900,2269.6 3144,2269.6 ; 3144,2269.6 3189.26,2269.6 3258.86,2200 ; 3144,2269.6 3144,2494 L2.1 3258.86,2441.14 3258.86,2200
  Top Layer w50: C5.2 2349.77,2510.86 2332.33,2510.86 2237,2606.19 2237,3178 2403.15,3344.15 C1.2 ; C4.2 2776.57,2525 L2.1 3179.78,2529.78 3179.78,2565.78 3400,2786 PS1.2 3400,3400 pad.17
  Bottom Layer w25: K10.1 435.83,2475 T1.3 ; C10.2 861.44,1624.19 1749.86,1624.19 1800.67,1675 IC3.32 2050,1675 K12.10 ; IC3.18 1766,775 1812,729 1933,729 1989,673 2423,673 K11.6 2691,509 3081,509 ; D2.2 1815,2700 2004.37,2510.63 C5.2 ; K3.1 3574.11,974.11 3546.11,974.11 3081,509 ; pad.19 3768.86,600 3677.86,509 3081,509
  Bottom Layer w50: BR2.4 BR1.4 2008.06,3787.22 2008.06,3723.94 2329.14,3402.86 2400.29,3402.86 C1.2 ; C5.2 2512.2,2510.63 C4.2 ; C2.2 2850.23,1900.23 2850.23,1924.76 2909.47,1984 3438.64,1984 T5.1@3595.96,1826.68 ; T5.1 3765,1992.36 3765,2112.64 T4.3
NetBR1_1: BR1.1 C4.1 PS1.1 | length 1798.9
  Bottom Layer w50: BR1.1 2588.98,2909.45 C4.1 2848.43,3000 2948.43,3100 PS1.1
NetBR1_2: BR1.2 BR2.3 | length 422.3
  Bottom Layer w25: BR1.2@1995.28,3204.72 BR1.2
  Bottom Layer w50: BR2.3 BR1.2@1995.28,3204.72
NetBR1_3: BR1.3 K1.2 RE1.6 | length 1585.7
  Top Layer w50: K1.2 1100,3198.43 RE1.6
  Bottom Layer w50: K1.2 1200,3500 1452,3500 1577,3625 1875,3625 BR1.3
NetBR2_2: BR2.2 K2.1 RE1.7 | length 1367.6
  Top Layer w50: K2.1 700,3400 RE1.7
  Bottom Layer w50: RE1.7 1104.72,3204.72 BR2.2
NetC7_2: C7.2 IC2.5 R4.1 | length 1475.5
  Top Layer w25: C7.2 2612.4,1516.34 IC2.5 ; R4.1 3267.68,1921.68 3267.68,1847.32 v1(3271,1844)
  Bottom Layer w25: IC2.5 3271,1742.26 v1(3271,1844)
NetC11_2: C11.2 IC3.17 L1.1 | length 1867.6
  Top Layer w25: C11.2 587.4,1647.4 v1(631,1691) ; L1.1 925,1674.8 925,950 950,925 1200,925 IC3.17
  Bottom Layer w25: v1(631,1691) 631,1819 700,1888 900,1888 959.45,1828.55 L1.1
NetC13_2: C13.2 IC2.3 R13.1 | length 2261.8
  Top Layer w25: IC2.3 2449,1472.26 2449,1551 2175,1825 2175,1875 2200,1900 2272,1900 2390,2018 2390,2132 2500,2242 2575,2242 2612.4,2204.6 C13.2 ; v1(3200.63,1067) R13.1
  Bottom Layer w25: IC2.3 2609,1312.26 2609,1200 2742,1067 v1(3200.63,1067)
NetC14_1: C14.1 K11.3 | length 574.7
  Top Layer w25: C14.1 2112.4,700 2187.4,775 2400,775 2425,800 2425,875 K11.3
NetC14_2: C14.2 D3.2 IC3.29 | length 949.5
  Top Layer w25: C14.2 2037.6,725.4 2025,738 2025,1250 D3.2
  Bottom Layer w25: IC3.29 1932.48,1300 D3.2
NetC22_2: 
NetC23_2: 
NetC24_2: 
NetDS1_1: 
NetDS1_2: 
NetDS1_4: 
NetDS1_5: 
NetDS1_6: 
NetDS1_7: 
NetDS1_8: 
NetDS1_9: 
NetDS1_10: 
NetDS2_8: 
NetDS3_8: 
NetDS4_8: 
NetIC1_17: 
NetIC1_18: 
NetIC2_1: IC2.1 R12.1 R14.2 | length 1907.8
  Top Layer w25: R12.1 2837.4,674.5 2966.5,674.5 ; v1(2887,1450) 2909.06,1427.94 2909.06,731.94 2966.5,674.5 ; R14.2 3279.37,777.37 3176.5,674.5 2966.5,674.5
  Bottom Layer w25: IC2.1 2594.27,1600 2744.27,1450 v1(2887,1450)
NetIC2_2: IC2.2 R11.2 R15.2 | length 2042.5
  Top Layer w25: v1(2721,1207) 2843.4,1084.6 R11.2 ; v1(3478,1129) 3507.13,1099.87 R15.2@3507.13,627
  Bottom Layer w25: IC2.2 2721,1300.26 ; v1(2721,1207) 2721,1300.26 ; v1(3478,1129) 2800,1129 2733,1196 2733,1288.26 2721,1300.26
NetIC2_6: IC2.6 R1.2 R8.2 | length 2097.7
  Top Layer w25: R1.2 2976.58,1565 2884,1565 2873,1554 2812,1554 2783,1525 2783,1445.74 IC2.6 2874.06,1354.68 2874.06,1254 2800,1254 2749,1305 2700,1305 2673,1278 2673,1038 2720,991 2720,562 3084,562 3118,596 3266.87,596 R8.2@3266.87,627
NetIC2_7: IC2.7 R1.1 R5.2 | length 460.7
  Top Layer w25: IC2.7 3022.39,1500 3051.39,1529 ; R1.1 3051.39,1529 ; R5.2 3051.39,1469.98 3051.39,1529
NetIC3_1: IC3.1 R19.1 | length 350.4
  Top Layer w25: R19.1 1009,2546.4 1009,2577 1105,2577 1196.19,2485.81 1250,2485.81 IC3.1
NetIC3_2: IC3.2 K7.2 R16.1 | length 2441
  Top Layer w25: K7.2 558.86,1725 583.86,1750 R16.1
  Bottom Layer w25: K7.2 167,1821.19 167,2578 867,2578 1070,2375 IC3.2
NetIC3_7: IC3.7 K5.1 | length 1672.1
  Top Layer w25: K5.1 593,650 850,907 850,1700.31 909,1759.31 1059.68,1759.31 1159.87,1859.5 1234.5,1859.5 IC3.7
NetIC3_8: IC3.8 K5.2 | length 1693.7
  Top Layer w25: K5.2 762.8,725 1271,725 1296,750 1296,1729 IC3.8
NetIC3_12: IC3.12 K9.1 | length 316.4
  Bottom Layer w25: K9.1 1075,1375 IC3.12
NetIC3_13: IC3.13 K9.2 | length 316.4
  Bottom Layer w25: K9.2 1062,1175 1162,1275 IC3.13
NetIC3_14: IC3.14 K9.3 | length 316.4
  Bottom Layer w25: K9.3 1062,1075 1162,1175 IC3.14
NetIC3_15: IC3.15 K9.4 | length 316.4
  Bottom Layer w25: K9.4 1062,975 1162,1075 IC3.15
NetIC3_16: IC3.16 K9.5 | length 316.4
  Bottom Layer w25: K9.5 1150,875 IC3.16
NetIC3_19: IC3.19 R7.2 | length 3222.3
  Top Layer w25: v1(390,1956) 600,1956 689,2045 689,2411.4 637.4,2463 R7.2
  Bottom Layer w25: v1(390,1956) 390,1541 202,1353 202,889 541,550 1125,550 IC3.19
NetIC3_20: IC3.20 K4.1 | length 1514.9
  Top Layer w25: K4.1 489,1024.19 489,600 514,575 IC3.20
NetIC3_21: IC3.21 K4.2 | length 2085.9
  Top Layer w25: K4.2 431,932.19 431,600 552,479 1761.48,479 IC3.21
NetIC3_22: IC3.22 K4.3 | length 1708.2
  Bottom Layer w25: K4.3 488.19,725 1732.09,725 1782.09,675 IC3.22
NetIC3_23: IC3.23 K6.2 | length 1389.6
  Bottom Layer w25: K6.2 825,925 1061.5,925 1161.5,1025 1607.48,1025 IC3.23
NetIC3_24: IC3.24 K6.3 | length 1389.6
  Bottom Layer w25: K6.3 825,1025 1062,1025 1162,1125 1607.48,1125 IC3.24
NetIC3_27: IC3.27 K11.1 | length 837.8
  Bottom Layer w25: IC3.27 2004,1028.48 2004,800 2079,725 K11.1
NetIC3_28: IC3.28 K11.4 | length 762.5
  Bottom Layer w25: IC3.28 1960.48,1172 2228,1172 K11.4
NetIC3_30: IC3.30 K11.5 | length 1138.5
  Bottom Layer w25: IC3.30 2184,1475 2525,1134 2525,875 K11.5
NetIC3_33: IC3.33 K10.3 | length 1760
  Bottom Layer w25: K10.3 491.19,1947 1017,1947 1139,1825 1735.02,1825 1785.02,1775 IC3.33
NetIC3_34: IC3.34 K10.2 | length 2175.5
  Bottom Layer w25: K10.2 202,2386.19 202,2543 847.85,2543 1065.85,2325 1407.48,2325 IC3.34
NetIC3_35: IC3.35 K12.4 R22.2 | length 1809.8
  Top Layer w25: K12.4 1950,1975 IC3.35 1904,2021.52 1904,2121 1822,2121 1776,2075 1776,1450 1801,1425 2100,1425 2216.14,1308.86 R22.2
NetIC3_36: IC3.36 K12.2 R21.1 | length 1299.8
  Top Layer w25: IC3.36 1811,2028.52 1811,1550 1840,1521 1973,1521 2019,1475 R21.1
  Bottom Layer w25: IC3.36 2000,2075 K12.2
NetIC3_37: IC3.37 K12.3 | length 319.3
  Bottom Layer w25: IC3.37 2000,2175 K12.3
NetIC3_38: IC3.38 K12.5 | length 277.9
  Bottom Layer w25: IC3.38 1882.48,2250 K12.5
NetIC3_39: IC3.39 K12.7 | length 519.3
  Bottom Layer w25: IC3.39 2100,2375 2175,2300 2175,2200 K12.7
NetIC3_40: IC3.40 K12.9 | length 888.8
  Top Layer w25: IC3.40 2148,2475 2275,2348 2275,2000 K12.9
NetK1_1: K1.1 RE1.3 | length 837.3
  Top Layer w50: RE1.3 1300,2906.3 K1.1
NetK2_2: K2.2 RE1.2 RE1.5 | length 1521.5
  Top Layer w50: K2.2 500,3304.72 RE1.2
  Bottom Layer w50: RE1.2 1005.4,2810.13 1059.13,2810.13 1342.75,3093.75 1390.6,3093.75 RE1.5
NetK3_2: K3.2 R2.1 R4.2 R9.2 R13.2 | length 1800.6
  Top Layer w25: R2.1 R9.2 3134.63,1026.37 3144.5,1016.5 3221.87,1016.5 3279.37,1074 R13.2 3279.37,1126.74 3316,1163.37 3316,1671 3185.63,1801.37 R4.2 ; 3316.37,1163 3353.37,1200 K3.2
NetK8_1: K8.1 L2.3 | length 418.2
  Bottom Layer w50: L2.3 3500,2600 K8.1
NetK8_2: K8.2 L2.2 | length 438.9
  Top Layer w50: L2.2 3550,2800 K8.2
NetL2_4: L2.4 T3.2 | length 1104.6
  Bottom Layer w50: L2.4 3179.78,2829.78 3179.78,2849.78 3230,2900 3757,2900 3872,3015 3872,3169.05 3872.8,3169.85 3872.8,3230.15 3802.95,3300 T3.2
NetLD1_1: 
NetLD1_3: 
NetLD2_1: 
NetLD4_1: 
NetLD4_3: 
NetLD5_1: 
NetR7_1: R7.1 R10.1 T1.2 | length 771.7
  Top Layer w25: T1.2 654,2266.4 654,2372.6 562.6,2464 R7.1 562.6,2575 592.6,2605 803.86,2605 833.86,2575 R10.1
NetR11_1: R11.1 R12.2 | length 376.3
  Top Layer w25: R12.2 2762.6,797 2768.6,803 R11.1
NetR17_1: R17.1 T2.2 T4.1 T5.2 | length 1020.4
  Top Layer w25: R17.1 3632.28,1432.28 T2.2
  Top Layer w50: T4.1 3597.64,1927.36 T5.2 T2.2
NetR18_1: R18.1 T2.3 T5.3 | length 1924
  Top Layer w25: R18.1 3350.71,1769.29 3350.71,1730.82 3351,1730.53 3351,1698.64 3365.64,1684 3459.36,1684 3474,1698.64 3474,2191 3580,2297 3795,2297 3866,2226 3866,1888.64 T5.3
  Top Layer w50: T2.3 T5.3
NetR18_2: R18.2 T3.1 | length 1834.9
  Top Layer w40: R18.2 3405,2549 3563.87,2707.87 3642.87,2707.87 3692,2757 3692,3292 T3.1
RegT4-MainR19: R19.2 R20.2 T4.2 | length 3382.7
  Top Layer w25: R19.2 1062.4,2455.6 v1(1093,2425) ; R20.2 3191.14,2100 v1(3335,2100)
  Bottom Layer w25: v1(1093,2425) 3425,2425 3648,2202 ; v1(3335,2100) 3437,2202 3648,2202 ; T4.2 3648,2202
VerR5-mainIO9: C6.1 IC3.9 R5.1 | length 3707.5
  Top Layer w25: v1(2961,1206) 2961,1292.37 2973.63,1305 ; R5.1 2973.63,1305 ; C6.1 3200.69,1347 3136,1347 3094,1305 2973.63,1305
  Bottom Layer w25: IC3.9 1025.81,1675 1010,1659.19 901.56,1659.19 840,1720.75 840,1806 800,1846 726,1846 726,1668 865,1529 2459,1529 2476,1546 2539.35,1546 2770,1315.35 2770,1284 2853,1201 2899.24,1201 2899.45,1201.22 2956.22,1201.22 v1(2961,1206)
VerR14-mainIO10: C12.2 IC3.10 R14.1 | length 3967.3
  Top Layer w25: C12.2 2912.4,2074.6 3036,1951 v1(3036,1884) v1(3036,1749) ; R14.1 3215.63,967 v1(3424,967)
  Bottom Layer w25: IC3.10 1786,1575 1832,1621 2430,1621 2558,1749 v1(3036,1749) ; v1(3036,1884) 3058,1906 3317,1906 3526,1697 3526,1069 v1(3424,967)
Vin: BR2.1 C1.1 R3.2 R17.2 T2.1 T3.3 | length 6646.3
  Top Layer w25: R17.2 T2.1
  Top Layer w40: R3.2 2508,2795.6 2508,3090.74 2789.37,3372.11 C1.1@2789.37,3392.52
  Top Layer w50: C1.1@2789.37,3392.52 C1.1
  Bottom Layer w50: BR2.1 1852.55,3062 2337,3062 2675,3400 C1.1 ; T2.1 3599.32,1501.68 3599.32,1514.68 3932.8,1848.16 3932.8,3466.92 3893.71,3506 2889.85,3506 2804.33,3420.48 2804.33,3407.48 C1.1 ; T3.3 3795.74,3204.26 3744.74,3204.26 3575.27,3373.73 2823.12,3373.73 C1.1
VoeR6R3-mainIO11: D2.1 IC3.11 R3.1 R6.2 | length 2962
  Top Layer w25: IC3.11 1204,1521 1204,1821 1300,1821 1470,1991 1470,2752 1587.4,2752 R6.2 1616,2700 1662,2746 2104,2746 D2.1
  Top Layer w35: D2.1 2150,2611 2311,2450 2389,2450 2412.6,2473.6 R3.1
VoeRE1mainT1: D1.2 RE1.8 T1.1 | length 1456.8
  Top Layer w25: D1.2 200,3299.21 RE1.8 464,3035.21 464,2242.1 T1.1
pads on no net: IC3.3 IC3.4 IC3.25 IC3.26 K12.6 K12.8 RE1.4

## Other copper
Top Layer:
  text "Soldeerstation Miguel Nunez v1.0" at 2212,457 h60

## Text inside footprints (layer, text, board x,y; h text height)
C1: Top Overlay "+" at 3054.72,3370.47 h59.06
C2: Top Overlay "+" at 3009.45,1880.32 h39.37
C4: Top Overlay "+" at 2968.5,2620.47 h59.06
C5: Top Overlay "+" at 2369.68,2670.08 h39.37 r90
C10: Top Overlay "+" at 794.68,1870.08 h39.37 r90